# EAGLE board 4UP.v1 (EAGLE 7.3.0)
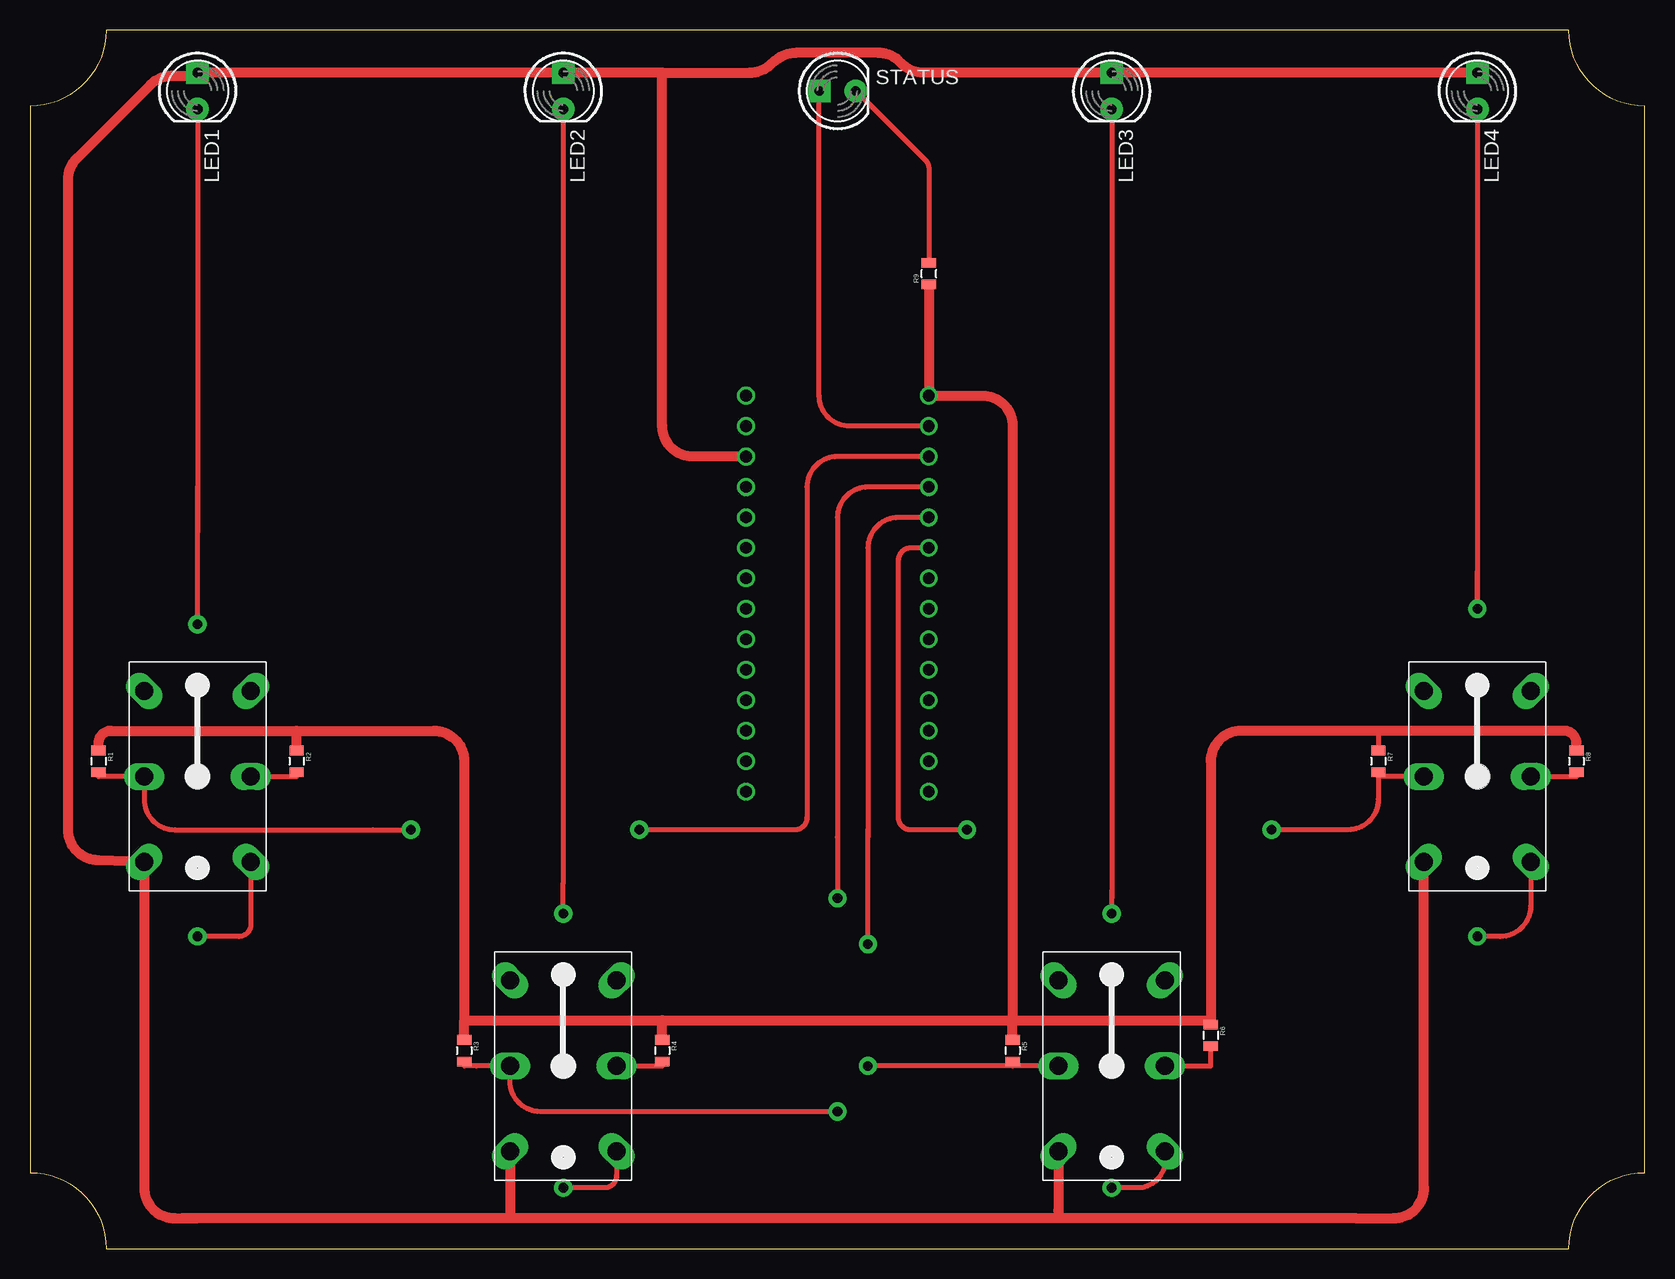
[diagram p0: board, top side]
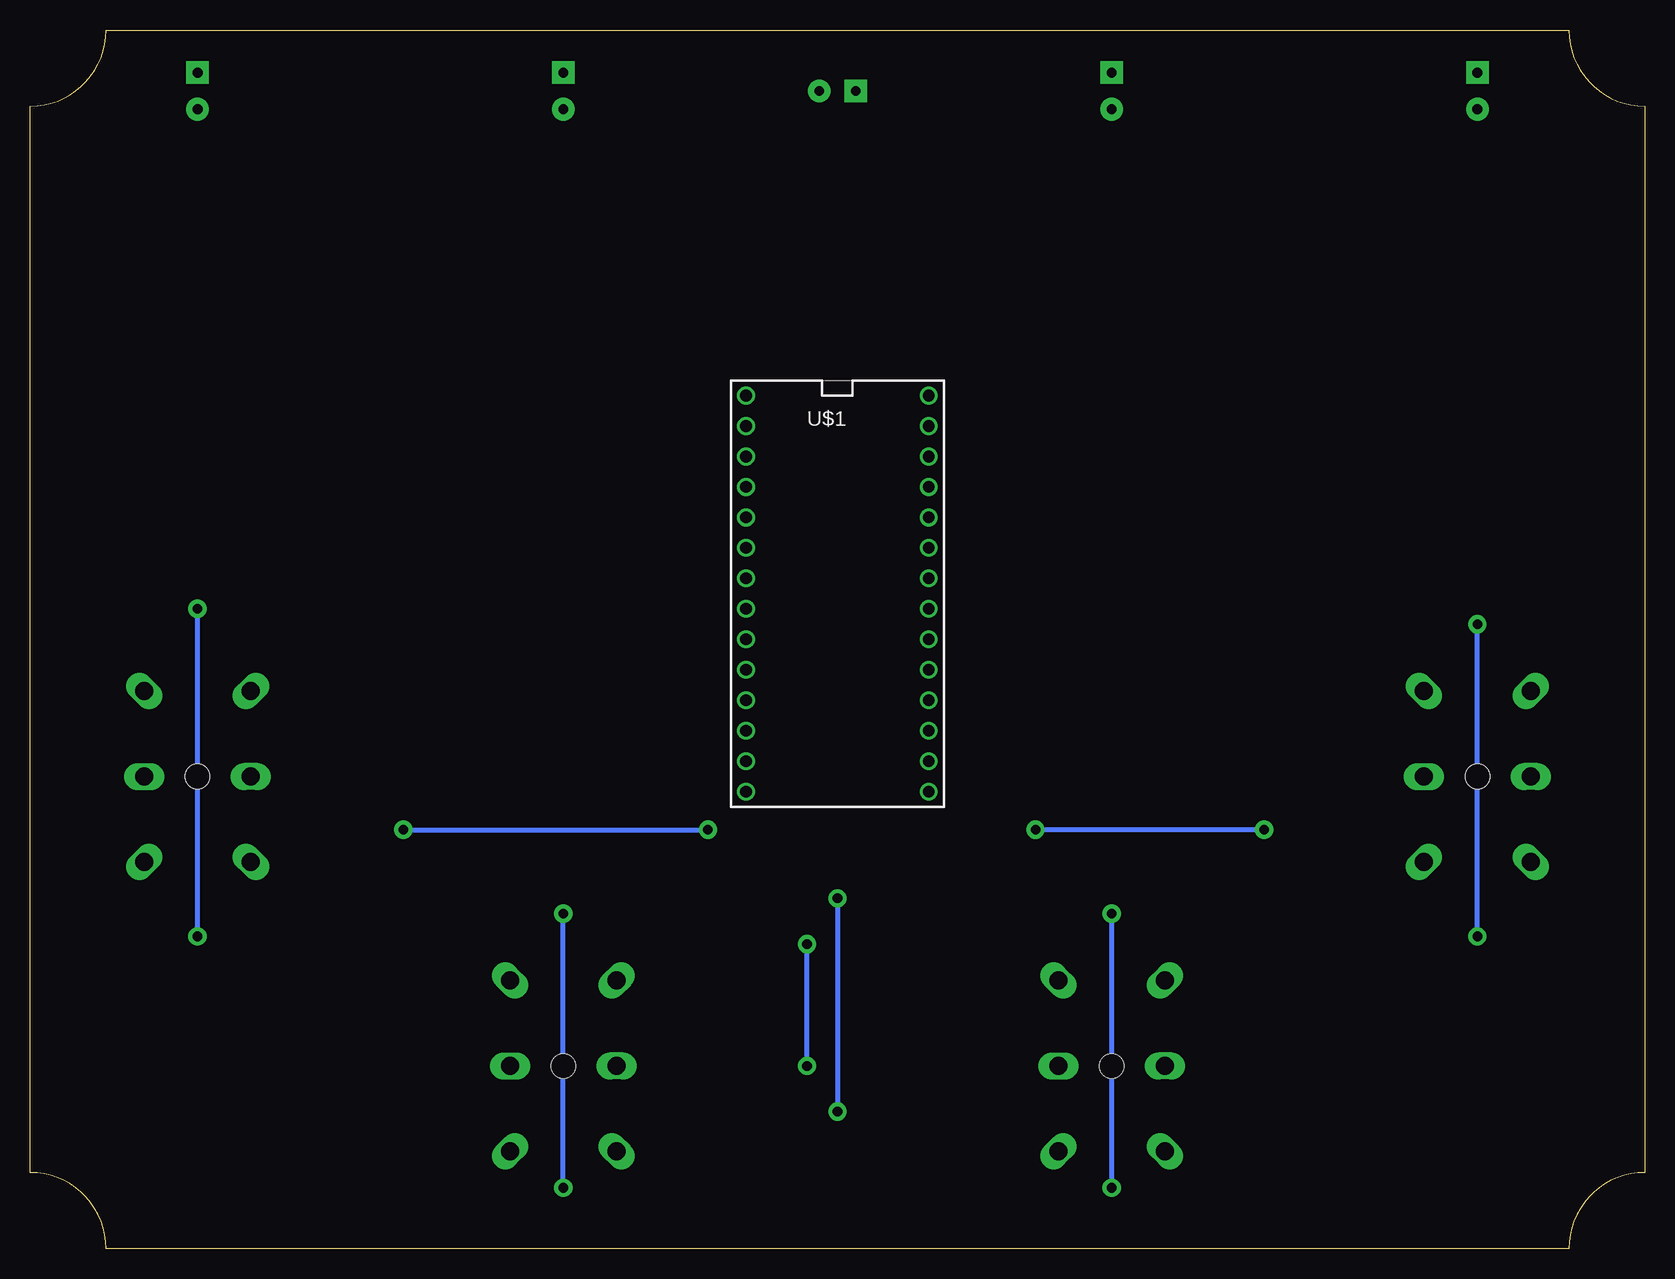
[diagram p1: board, bottom side, seen from below]

Size 134.62 x 101.6 mm. Coordinates in mm from the lower left corner, seen from the top.
Outline: 6.35,0 128.27,0 arc-90 134.62,6.35 134.62,95.25 arc-90 128.27,101.6 6.35,101.6 arc-90 0,95.25 0,6.35 arc-90 6.35,0
Copper layers (1*16): Top 0.035mm / dielectric 1.5mm / Bottom 0.035mm
Design rules "Othermill-DRC-1-32": minimum track width 8mil, minimum drill 0.8mm, track to track 0.794003125mm, track to pad 0.794003125mm, pad to pad 0.794003125mm, via to via 0.794003125mm, smd to smd 0mil, copper to edge 0mil, drill to drill 1mil, minimum pad ring 10mil, minimum via ring 10mil, stop-mask expansion 1mil, vias tented up to drill 30mil, thermal gap 10mil
Holes 2.03 mm at 13.97,39.37 44.45,15.24 90.17,15.24 120.65,39.37

## Footprints (pad centres in the part's own frame; a part is rotated, then mirrored left to right if it is on the bottom)
LED5MM = drill 0.813 pad 1.88 square: A -1.524,0 | drill 0.813 pad 1.88: K 1.524,0
0805 = smd 0.8 x 1.2: 1 -0.9,0; 2 0.9,0
FOOTSWITCH = drill 1.5 long: P$1 -4.445,7.112; P$2 -4.445,0; P$3 -4.445,-7.112; P$4 4.445,7.112; P$5 4.445,0; P$6 4.445,-7.112
TEENSY_3.0_DIP = drill 0.965: 0 -7.62,13.97; 1 -7.62,11.43; 2 -7.62,8.89; 3 -7.62,6.35; 3.3V 7.62,11.43; 4 -7.62,3.81; 5 -7.62,1.27; 6 -7.62,-1.27; 7 -7.62,-3.81; 8 -7.62,-6.35; 9 -7.62,-8.89; 10 -7.62,-11.43; 11 -7.62,-13.97; 12 -7.62,-16.51; 13 7.62,-16.51; 14/A0 7.62,-13.97; 15/A1 7.62,-11.43; 16/A2 7.62,-8.89; 17/A3 7.62,-6.35; 18/A4 7.62,-3.81; 19/A5 7.62,-1.27; 20/A6 7.62,1.27; 21/A7 7.62,3.81; 22/A8 7.62,6.35; 23/A9 7.62,8.89; AGND 7.62,13.97; GND -7.62,16.51; VIN 7.62,16.51

## Placement (x,y rotation side)
LED1  [LED5MM]  13.97,96.52 270 top
LED2  [LED5MM]  44.45,96.52 270 top
LED3  [LED5MM]  90.17,96.52 270 top
LED4  [LED5MM]  120.65,96.52 270 top
R1  10K  [0805]  5.71,40.64 270 top
R2  1K  [0805]  22.23,40.64 270 top
R3  10K  [0805]  36.2,16.51 270 top
R4  1K  [0805]  52.7,16.51 270 top
R5  10K  [0805]  81.92,16.51 270 top
R6  1K  [0805]  98.42,17.78 270 top
R7  10K  [0805]  112.39,40.64 270 top
R8  1K  [0805]  128.91,40.64 270 top
R9  10K  [0805]  74.93,81.28 90 top
STATUS  [LED5MM]  67.31,96.52 0 top
SW1  FOOTSWITCH_DPDT  [FOOTSWITCH]  13.97,39.37 0 top
SW2  FOOTSWITCH_DPDT  [FOOTSWITCH]  44.45,15.24 0 top
SW3  FOOTSWITCH_DPDT  [FOOTSWITCH]  90.17,15.24 0 top
SW4  FOOTSWITCH_DPDT  [FOOTSWITCH]  120.65,39.37 0 top
U$1  TEENSY_3.0_DIP  [TEENSY_3.0_DIP]  67.31,54.61 0 bottom

## Library data of the parts
LED1-LED4 STATUS = SparkFun-LED
R1-R9 = SparkFun-Passives
SW1-SW4 = barsstronics
U$1 = Teensy3.0

## Nets
3.3V: LED1.A LED2.A LED3.A LED4.A SW1.P$3 SW2.P$3 SW3.P$3 SW4.P$3 U$1.3.3V
AGND: U$1.AGND
GND: R1.1 R2.1 R3.1 R4.1 R5.1 R6.1 R7.1 R8.1 R9.1 U$1.GND
N$1: R4.2 SW2.P$5
N$2: R2.2 SW1.P$5
N$3: LED1.K SW1.P$6
N$4: LED2.K SW2.P$6
N$5: R6.2 SW3.P$5
N$6: LED3.K SW3.P$6
N$7: R8.2 SW4.P$5
N$8: LED4.K SW4.P$6
N$9: R9.2 STATUS.K
N$10: STATUS.A U$1.0
SW1: R1.2 SW1.P$2 U$1.1
SW2: R3.2 SW2.P$2 U$1.2
SW3: R5.2 SW3.P$2 U$1.3
SW4: R7.2 SW4.P$2 U$1.4
VIN: U$1.VIN

## Tracks (layer width: path | path; a pad name or v marks a point on that pad's centre or on a via)
3.3V
  Top 0.813: LED4.A LED3.A | 52.7,98.04 LED2.A LED1.A 13.72,97.79 11.85,97.79 arc45 10.05,97.05 3.92,90.91 arc45 3.17,89.12 3.17,50.8 3.17,34.92 arc90 5.71,32.38 SW1.P$3 9.53,5.08 arc90 12.06,2.54 12.7,2.54 | SW4.P$3 116.2,5.08 arc-90 113.67,2.54 110.49,2.54 85.72,2.54 | 85.72,2.54 40.01,2.54 | 40.01,2.54 13.97,2.54 | 13.97,2.54 13.34,2.54 | 13.34,2.54 12.7,2.54 | SW2.P$3 40.01,2.54 | SW3.P$3 85.72,3.17 85.72,2.54 | 12.7,2.54 13.34,2.54 | 12.7,2.54 13.34,2.54 | 13.34,2.54 13.97,2.54 | 13.97,2.54 13.34,2.54 | U$1.3.3V 55.24,66.04 arc-90 52.7,68.58 52.7,98.04 | 52.7,98.04 60.01,98.04 arc41 61.68,98.67 62.15,99.07 arc-41 63.81,99.69 70.7,99.69 arc-45 72.5,98.95 72.66,98.79 arc45 74.46,98.04 LED3.A | LED3.A 90.17,97.79
GND
  Top 0.406: 112.39,43.18 R7.1 | 22.23,43.18 R2.1 | 52.7,19.05 R4.1 | R6.1 98.42,19.05
  Top 0.813: R8.1 128.91,42.16 arc90 127.89,43.18 112.39,43.18 100.97,43.18 arc90 98.42,40.64 98.42,19.05 81.92,19.05 | R1.1 5.71,42.16 arc-90 6.73,43.18 22.23,43.18 | R3.1 36.2,19.05 | 36.2,19.05 52.7,19.05 | R4.1 52.7,19.05 | 52.7,19.05 81.92,19.05 | R5.1 81.92,19.05 | R2.1 22.23,43.18 | 22.23,43.18 33.66,43.18 arc-90 36.2,40.64 36.2,19.05 | 81.92,19.05 81.92,68.58 arc90 79.38,71.12 U$1.GND R9.1
N$1
  Top 0.406: SW2.P$5 51.69,15.24 52.7,15.24 R4.2
N$2
  Top 0.406: SW1.P$5 21.21,39.37 22.23,39.37 R2.2
N$3  (via drill 0.8 pad 1.52)
  Top 0.406: LED1.K 13.97,63.5 | 13.97,63.5 13.97,59.69 | SW1.P$6 18.41,27.05 arc-90 17.4,26.04 v13.97,26.04 | v13.97,52.07 13.97,63.5
  Bottom 0.406: v13.97,26.04 v13.97,52.07
N$4  (via drill 0.8 pad 1.52)
  Top 0.406: LED2.K 44.45,30.48 v44.45,27.94 | SW2.P$6 48.9,6.1 arc-90 47.88,5.08 v44.45,5.08
  Bottom 0.406: v44.45,5.08 v44.45,27.94
N$5
  Top 0.406: SW3.P$5 98.42,15.24 R6.2
N$6  (via drill 0.8 pad 1.52)
  Top 0.406: LED3.K 90.17,29.84 | 90.17,29.84 90.17,29.21 | SW3.P$6 arc-90 92.71,5.08 v90.17,5.08 | v90.17,27.94 90.17,29.84
  Bottom 0.406: v90.17,5.08 v90.17,27.94
N$7
  Top 0.406: SW4.P$5 127.89,39.37 128.91,39.37 R8.2
N$8  (via drill 0.8 pad 1.52)
  Top 0.406: LED4.K 120.65,56.52 | 120.65,56.52 v120.65,53.34 120.65,56.52 | SW4.P$6 125.09,28.57 arc-90 122.56,26.04 v120.65,26.04
  Bottom 0.406: v120.65,26.04 v120.65,53.34
N$9
  Top 0.406: R9.2 74.93,90.17 arc45 74.75,90.6 STATUS.K
N$10
  Top 0.406: U$1.0 68.33,68.58 arc-90 65.79,71.12 STATUS.A
SW1  (via drill 0.8 pad 1.52)
  Top 0.406: U$1.1 72.39,66.04 67.31,66.04 arc90 64.77,63.5 64.77,35.94 arc-90 63.75,34.92 51.44,34.92 | 51.44,34.92 v50.8,34.92 51.44,34.92 | v31.75,34.92 28.57,34.92 12.06,34.92 arc-90 9.53,37.47 SW1.P$2 5.71,39.37 R1.2
  Bottom 0.406: v31.75,34.92 v50.8,34.92
SW2  (via drill 0.8 pad 1.52)
  Top 0.406: U$1.2 69.85,63.5 arc90 67.31,60.96 67.31,34.29 v67.31,29.21 | v67.31,11.43 42.55,11.43 arc-90 40.01,13.97 SW2.P$2 37.21,15.24 36.2,15.24 R3.2
  Bottom 0.406: v67.31,29.21 v67.31,11.43
SW3  (via drill 0.8 pad 1.52)
  Top 0.406: SW3.P$2 81.92,15.24 | 81.92,15.24 R5.2 81.92,15.24 | U$1.3 72.39,60.96 arc90 69.85,58.42 69.85,34.92 | 69.85,34.92 69.85,34.29 | 81.92,15.24 v69.85,15.24 | v69.85,25.4 69.85,34.92
  Bottom 0.406: v69.85,15.24 v69.85,25.4
SW4  (via drill 0.8 pad 1.52)
  Top 0.406: SW4.P$2 112.39,39.37 | 112.39,39.37 R7.2 | U$1.4 73.41,58.42 arc90 72.39,57.4 72.39,35.94 arc90 73.41,34.92 v78.11,34.92 | 112.39,39.37 112.39,37.47 arc-90 109.86,34.92 v103.5,34.92
  Bottom 0.406: v103.5,34.92 v78.11,34.92